# Altium PCB SixPak Ultra.PcbDoc (part 2 of 3)
Units mil, origin at the board's own origin, x right, y up, seen from the top; angles counter-clockwise.
Board outline 13094.87 x 4169.06 mil, 4 copper layers (Top Copper, GND, Signal Layer 2, Bottom Copper), stack 46.063 mil thick; 195 components, 300 nets, 1442 pads, 116 vias.
Unrouted connection lines stored in the file: 618.
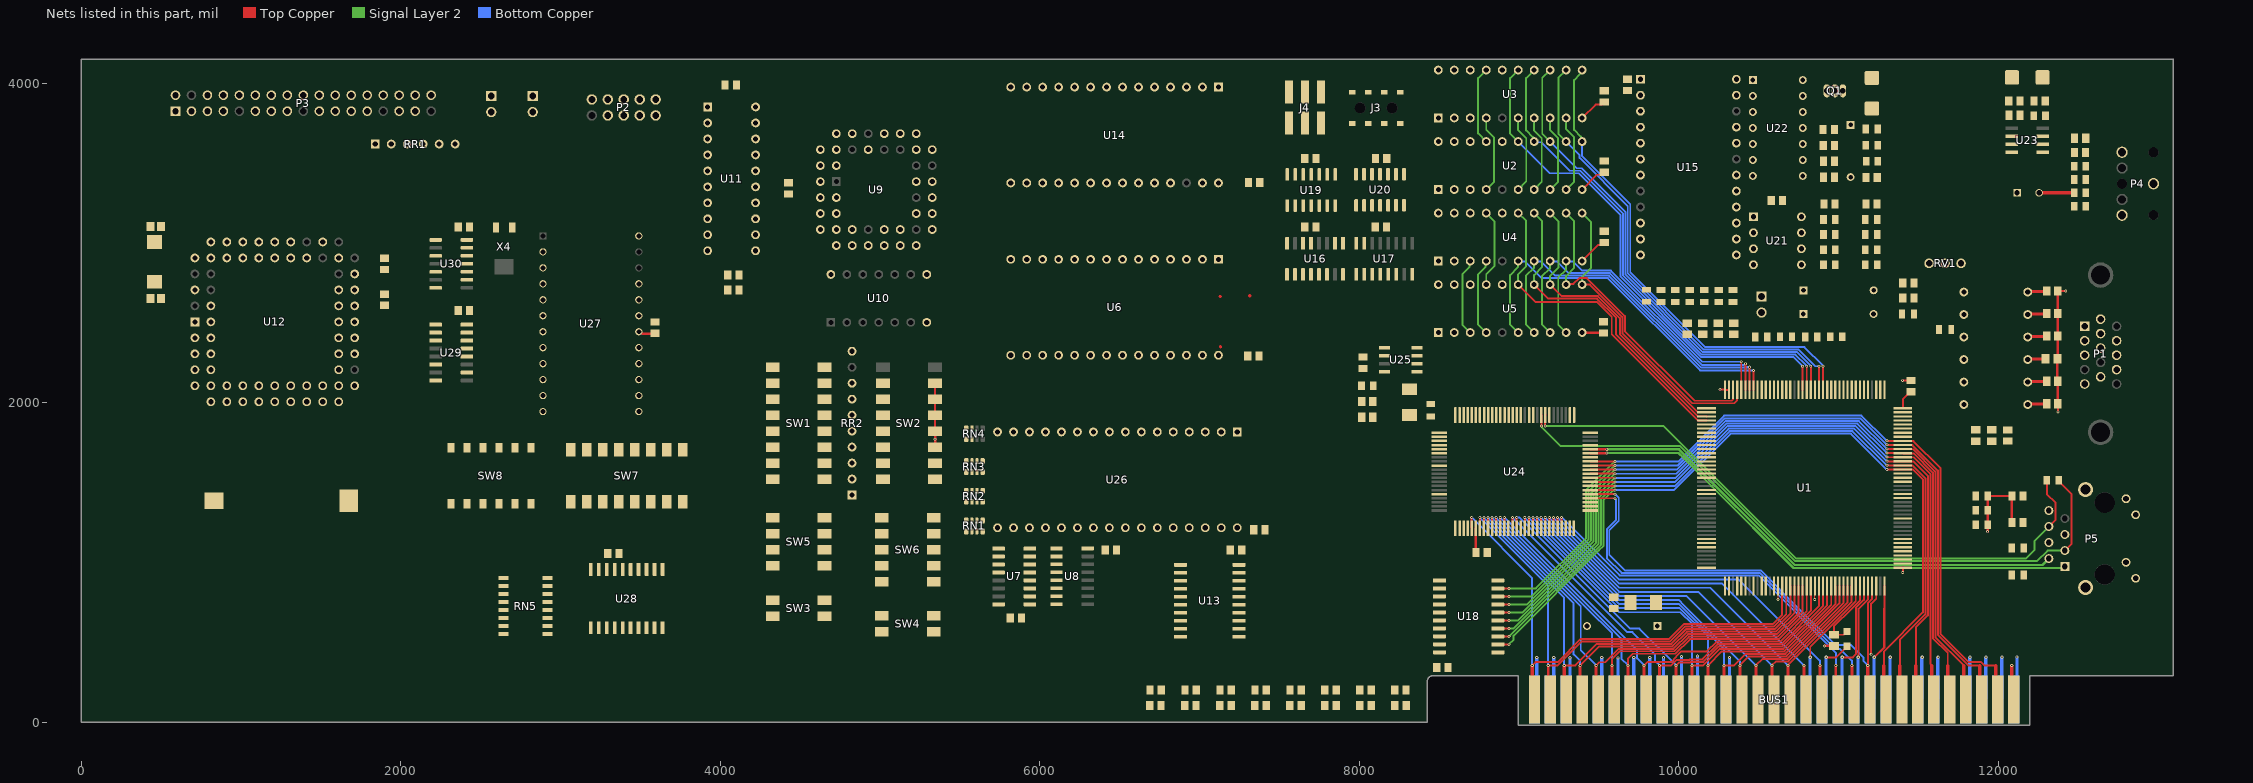
[diagram p4: the nets of this part, all layers, seen from the top]

## Part data
BT1: "Battery Holder (Open) Coin, 20.0mm 1 Cell SMD (SMT) Tab", Package=None, Availability=Unavailable, MF="{'manufacturer': u'Harwin Inc.'}", MP=S8421-45R, Price=None
C1 C2 C3 C4 C5 C6 C7 C8 C12 C14 C40 C48 C50 CD1 CD2 CD3 CD4 CD5 CD6 CD7 CD8 CD9 CD10 CD11 CD12 CD13 CD14 CD15 CD16 CD17 CD18 CD19 CD20 CD21 CD22 CD23 CD24 CD25 CD27 CD28 CD29 CD32: library part TAJR104K035RNJ, "0.1ÂµF Molded Tantalum Capacitors 35V 0805 _2012 Metric_ 29Ohm", Package="0805 AVX", Availability=Unavailable, MF=AVX, MP=TAJR104K035RNJ, Price=None, SnapEDA_Link=https://www.snapeda.com/parts/TAJR104K035RNJ/AVX%20/%20Kyocera/view-part/1689905/?ref=snap
C9 C10 C11 C13 C31 C49 C51 C52 C53 CD42 CD43: library part TACR106K016XTA, "Cap Tant Solid 10uF 16V R CASE 10% (2 X 1.35 X 1.35mm) SMD 2012-15 5 Ohm 125ÂÂŽ T/R", Package=None, Availability=Unavailable, MP=TACR106K016XTA, Price=None
C15 C16: library part CGA4J2X8R1H104K125AA, "0.1 ÂµF Â±10% 50V Ceramic Capacitor X8R 0805 (2012 Metric)", Package="2012 TDK", Check_prices=https://www.snapeda.com/parts/CGA4J2X8R1H104K125AA/TDK/view-part/?ref=eda, Digi-Key_Part_Number=445-5909-2-ND, MF=TDK, MP=CGA4J2X8R1H104K125AA, Purchase-URL=https://pricing.snapeda.com/search/part/CGA4J2X8R1H104K125AA/?ref=eda, SnapEDA_Link=https://www.snapeda.com/parts/CGA4J2X8R1H104K125AA/TDK/view-part/?ref=snap
C17: library part C0805C101J5RAC7800, Package=None, Availability=Unavailable, MP=C0805C101J5RAC7800, Price=None
C18 C19 C20 C21 C22 C23 C24 C26 C27: library part 08055A470JAT2A, "Capacitor: ceramic; 47pF; 50V; C0G; Â±5%; SMD; Case (inch):0805", Package=None, Availability=Unavailable, MP=08055A470JAT2A, Price=None
C25: library part CC0805KFX7R8BB105, "1ÂµF Â±10% 25V Ceramic Capacitor X7R 0805 (2012 Metric)", Package="0805 Yageo", Arrow_Electronics-Purchase-URL=https://snapeda.com/shop?store=Arrow+Electronics&id=1817011, Availability=Good, BuyPart=https://www.snapeda.com/parts/CC0805KFX7R8BB105/Yageo/view-part/1817011/?ref=eda, MF=Yageo, Mouser-Purchase-URL=https://snapeda.com/shop?store=Mouser&id=1817011, MP=CC0805KFX7R8BB105, Price=None, SnapEDA_Link=https://www.snapeda.com/parts/CC0805KFX7R8BB105/Yageo/view-part/1817011/?ref=snap
C28 C29: library part CMP-2007-01412-1, Manufacturer=Vitramon, Part Number=VJ0805A220KXJPW1BC
C30 C32 C33 C34 C35: library part C0805C472J2GAC7800, Package=None, Availability=Unavailable, MP=C0805C472J2GAC7800, Price=None
C36: library part TACR475M020XTA, "4.7uF SMD Solid MnO2 Tantalum Electrolytic Capacitor, 20 V dc +/-20%, TAC Series", Package=None, Availability=Unavailable, MP=TACR475M020XTA, Price=None
C37 C41: library part TAJC106J016RNJ, "10ÂµF Molded Tantalum Capacitors 16V 2312 (6032 Metric) 2Ohm", Package="2312 AVX", Availability=Bad, Check_prices=https://www.snapeda.com/parts/TAJC106J016RNJ/AVX/view-part/1684768/?ref=eda, MF=AVX, MP=TAJC106J016RNJ, Price=None, Purchase-URL=https://pricing.snapeda.com/search/part/TAJC106J016RNJ/?ref=eda, SnapEDA_Link=https://www.snapeda.com/parts/TAJC106J016RNJ/AVX/view-part/1684768/?ref=snap
C38: library part 0805YC102JAT2A, "CAP CER 1000PF 16V 5% X7R 0805", Package=None, Availability=Unavailable, MP=0805YC102JAT2A, Price=None
C39: library part C0805C271F5GACTU, "CAP, MLCC, C0G, 270PF, 50V, 0805", Package=None, Availability=Unavailable, MP=C0805C271F5GACTU, Price=None
C42: library part CGA4C2C0G1H472J060AA, "4700 pF Â±5% 50V Ceramic Capacitor C0G, NP0 0805 (2012 Metric)", Package="2012 TDK", Availability="In Stock", Check_prices=https://www.snapeda.com/parts/CGA4C2C0G1H472J060AA/TDK/view-part/?ref=eda, MF=TDK, MP=CGA4C2C0G1H472J060AA, Price=None, Purchase-URL=https://pricing.snapeda.com/search/part/CGA4C2C0G1H472J060AA/?ref=eda, SnapEDA_Link=https://www.snapeda.com/parts/CGA4C2C0G1H472J060AA/TDK/view-part/?ref=snap
C43: library part ECA1CM471, "470F 16V Aluminum Electrolytic Capacitors Radial, Can 2000 Hrs @ 85C", Package="RADIAL-2 Panasonic", Availability="No availability data", Check_prices=https://www.snapeda.com/parts/ECA1CM471/Panasonic/view-part/5788233/?ref=eda, MF=Panasonic, MP=ECA1CM471, Price=None, SnapEDA_Link=https://www.snapeda.com/parts/ECA1CM471/Panasonic/view-part/5788233/?ref=snap
C44 C45: library part C0805C100K4HACAUTO, Package=None, Availability=Unavailable, MP=C0805C100K4HACAUTO, Price=None
C46 C47: library part C0805C103J4RAC7800, Package=None, Availability=Unavailable, MP=C0805C103J4RAC7800, Price=None
D1: "Small Signal Fast Switching Diodes", Package=None, Availability=Unavailable, MP=1N4148, Price=None
J1 J2 J5: "Header, Friction Lock; MTA-100; 2; 250 VAC; Polyester; Tin; Copper Alloy; Tin", Package=None, Centerline_Pitch="2.54 mm[.1 in]", Digi-Key_Part_Number=A1911-ND, Digi-Key_Purchase_URL=https://www.digikey.com/product-detail/en/te-connectivity-amp-connectors/640452-2/A1911-ND/108973?utm_source=snapeda&utm_medium=aggregator&utm_campaign=symbol, MF="TE Connectivity", MP=640452-2, Number_of_Positions=2, Product_Type=Connector, SnapEDA_Link=https://www.snapeda.com/parts/640452-2/TE%20Connectivity%20AMP%20Connectors/view-part/2877927/?ref=snap, TE_purchase_URL=https://www.te.com/usa-en/product-640452-2.html?te_bu=Cor&te_type=disp&te_campaign=seda_glo_cor-seda-global-disp-prtnr-fy19-seda-model-bom-cta_sma-317_1&elqCampaignId=32493
J3: library part SAMTEC-TSM-104-01-X-DV-AJ, Package=SAMTEC-TSM-104-01-X-DV-A, DeviceName=J, DeviceSetName=SAMTEC-TSM-104-01-X-DV-A, GateName_1=A, LibraryName=SAMTEC-TSM-104-01-X-DV-A, SymbolName_1=SAMTEC-TSM-104-01-X-DV-AA
J4: library part TSM-103-01-T-DV, Package=None, Availability=Unavailable, MF=Samtec, MP=TSM-103-01-T-DV, Price=None
L1 L2 L3: library part 78F5R6J-RC, "No Description Available", Mfr_Name="Bourns Electronics", Copyright="Copyright (C) 2022 Ultra Librarian. All rights reserved.", Digi-Key_Part_Number_1=78F5R6J-RC-ND, Manufacturer_Part_Number=78F5R6J-RC, RefDes=RefDes, Type=DEV
P1: library part DE15
P2: library part 61201021621, "<b> WR-BHD 2.54mm Male Box Header, 10 Pins</b>=>Code : Con_WTB_BHD_2.54_Male_THT_WS_61201021621 <br><a href=\"http://katalog.we-online.de/media/thumbs2/eican/thb_Con_WTB_BHD_2.54_Male_THT_WS_6120xx21621_pf2.jpg\" title=\"Enlarge picture\"> <img src=\"http://katalog.we-online.de/media/thumbs2/eican/thb_Con_WTB_BHD_2.54_Male_THT_WS_6120xx21621_pf2.jpg\"  width=\"320\"></a><p> Details see: <a href=\"http://katalog.we-online.de/en/em/612_0xx_216_21\">http://katalog.we-online.de/en/em/612_0xx_216_21</a><p> Created 2014-06-04, Karrer Zheng<br> 2014 (C) WÃ¼rth Elektronik", Package=None, Availability=Unavailable, MF="{'manufacturer': u'Wurth Elektronik'}", MP=61201021621, Price=None
P3: library part CONN_17X2
P4: library part CONN_5
P5: "1 Port RJ45 Magjack Connector Through Hole 10/100 Base-T, AutoMDIX", Package=None, Digi-Key_Part_Number=RJMG1BD3B8K1ANR-ND, Digi-Key_Purchase_URL=https://www.digikey.com/product-detail/en/amphenol-icc-commercial-products/RJMG1BD3B8K1ANR/RJMG1BD3B8K1ANR-ND/5359794?utm_source=snapeda&utm_medium=aggregator&utm_campaign=symbol, MF="Amphenol ICC", MP=RJMG1BD3B8K1ANR, SnapEDA_Link=https://www.snapeda.com/parts/RJMG1BD3B8K1ANR/Amphenol%20FCI/view-part/1683132/?ref=snap
Q1 SW8 U7 U8 U13 U16 U17 U27 U28 U29 U30 X1: Package=None, Availability=Unavailable, Price=None
  Q1: MP=2N3904
  SW8: MF="{'manufacturer': u'CUI Devices'}", MP=DS04-254-2-06BK-SMT-TR
  U7 U8 U16 U17: MP=SN74ALS138ADR
  U13: MP=SN74LS688DW
  U27: MF="{'manufacturer': u'Maxim Integrated'}", MP=DS12885
  U28: MF="{'manufacturer': u'Texas Instruments'}", MP=SN74LS688DW
  U29: MF="{'manufacturer': u'Texas Instruments'}", MP=SN74HCT139D
  U30: MF="{'manufacturer': u'Texas Instruments'}", MP=CD74HC04M
  X1: MP=ABM3-40.000MHZ-B2-T
R1: library part ERJ6ENF1000V, Package=None, Availability=Unavailable, MP=ERJ6ENF1000V, Price=None
R2: library part AC0805FR-101KL, "1 kOhms Â±1% 0.125W, 1/8W Chip Resistor 0805 (2012 Metric) Automotive AEC-Q200 Thick Film", Package=None, Check_prices=https://www.snapeda.com/parts/AC0805FR-101KL/Yageo/view-part/?ref=eda, Digi-Key_Part_Number=13-AC0805FR-101KLTR-ND, MF=YAGEO, MP=AC0805FR-101KL, Purchase-URL=https://pricing.snapeda.com/search/part/AC0805FR-101KL/?ref=eda, SnapEDA_Link=https://www.snapeda.com/parts/AC0805FR-101KL/Yageo/view-part/?ref=snap
R3 R7 R8 R9: library part ERJ-6GEYJ151V, "Res Thick Film 0805 150 Ohm 5% 0.125W(1/8W) Â}200ppm/ÂÂŽ Molded SMD Automotive T/R", Package=None, Availability=Unavailable, MP=ERJ-6GEYJ151V, Price=None
R4 R5: library part RMCF0805JT33R0, Package=None, Availability=Unavailable, MP=RMCF0805JT33R0, Price=None
R6 R10 R11 R12 R13 R14 R15 R16: library part RC0805FR-074K7L, "4.7 kOhms Â±1% 0.125W, 1/8W Chip Resistor 0805 _2012 Metric_ Moisture Resistant Thick Film", Package="2012 Rohm Semiconductor", Digi-Key_Part_Number=311-4.70KCRCT-ND, Digi-Key_Purchase_URL=https://www.digikey.com.eg/product-detail/en/yageo/RC0805FR-074K7L/311-4.70KCRCT-ND/730876?utm_source=snapeda&utm_medium=aggregator&utm_campaign=symbol, MF=Yageo, MP=RC0805FR-074K7L, SnapEDA_Link=https://www.snapeda.com/parts/RC0805FR-074K7L/Yageo/view-part/523399/?ref=snap
R17: library part AC0805JR-072K2L, "AC0805 2,2K 5% 0,125W AUTOMO", Package=None, Availability=Unavailable, MP=AC0805JR-072K2L, Price=None
R18 R19 R22 R23 R26 R27: library part ERJ-PB6B2201V, Package=None, Availability=Unavailable, MP=ERJ-PB6B2201V, Price=None
R20: library part ERJ-PB6B1202V, Package=None, Availability=Unavailable, MP=ERJ-PB6B1202V, Price=None
R21 R25 R28 R31: library part ERJ-PB6B1002V, "10 kOhms Â±0.1% 0.25W, 1/4W Chip Resistor 0805 (2012 Metric) Automotive AEC-Q200, Pulse Withstanding Thick Film", Package="2012 Panasonic Electronic Components", Check_prices=https://www.snapeda.com/parts/ERJ-PB6B1002V/Panasonic%20Electronic%20Components/view-part/3737287/?ref=eda, Digi-Key_Part_Number=P20708CT-ND, MF="Panasonic Electronic", MP=ERJ-PB6B1002V, SnapEDA_Link=https://www.snapeda.com/parts/ERJ-PB6B1002V/Panasonic%20Electronic%20Components/view-part/3737287/?ref=snap
R24: library part ERJ-PB6B1501V, "Res Thick Film 0805 1.5K Ohm 0.1% 0.25W(1/4W) Â±50ppm/C Pad SMD Automotive T/R", Package=None, Availability=Unavailable, MP=ERJ-PB6B1501V, Price=None
R29 R30 R32 R33 R34: library part ERJ-PB6B8201V, Package=None, Availability=Unavailable, MP=ERJ-PB6B8201V, Price=None
R35 R36: library part ERJ-PB6B4700V, Package=None, Availability=Unavailable, MP=ERJ-PB6B4700V, Price=None
R37: library part RK73H2ARTTD2702F, "Res Thick Film 0805 27K Ohm 1% 0.25W(1/4W) Â±100ppm/Â°C Sulfur Resistant Pad SMD Automotive T/R", Package=None, Availability=Unavailable, MF="{'manufacturer': u'KOA Speer'}", MP=RK73H2ARTTD2702F, Price=None
R38: library part ERJ-PB6B2000V, "Res Thick Film 0805 200 Ohm 0.1% 0.25W(1/4W) Â±50ppm/C Pad SMD Automotive T/R", Package=None, Availability=Unavailable, MF="{'manufacturer': u'Panasonic'}", MP=ERJ-PB6B2000V, Price=None
RN1 RN2 RN3 RN4: library part EXB-38V103JV, "Res Thick Film Array 470 Ohm 5% ?200ppm/C ISOL Molded 8-Pin 1206(4 X 0603) Convex SMD Automotive T/R", Package=None, Availability=Unavailable, MF="{'manufacturer': u'Panasonic'}", MP=EXB-38V103JV, Price=None
RN5: library part 4816P-1-103LF, "Res Thick Film NET 68K Ohm 2% 1.28W Â±100ppm/C ISOL Molded 16-Pin SOM Gull Wing SMD Automotive T/R", Package=None, Availability=Unavailable, MF="{'manufacturer': u'Bourns'}", MP=4816P-1-103LF, Price=None
RR1: library part RR5
RR2: library part RR9
RV1: library part POT
SW1 SW2: "AD Series 8 Position SPST Extended Slide Non Sealed 2.54 mm Pitch SMT DIP Switch", Package="DIP-4 TE Connectivity", Availability=Unavailable, EU_RoHS_Compliance=Compliant, MF="TE Connectivity", MP=1-1825058-9, Price=None, SnapEDA_Link=https://www.snapeda.com/parts/1-1825058-9/TE%20Connectivity%20ALCOSWITCH%20Switches/view-part/52148/?ref=snap, TE_purchase_URL=https://www.te.com/usa-en/product-1-1825058-9.html?te_bu=Cor&te_type=disp&te_campaign=seda_glo_cor-seda-global-disp-prtnr-fy19-seda-model-bom-cta_sma-317_1&elqCampaignId=32493
SW3 SW4 SW5 SW6 SW7: "SPST Flush Slide Sealed 2.54 mm Pitch Surface Mount DIP Switch", Package=None, Availability=Unavailable, MF="{'manufacturer': u'TE Connectivity'}", Price=None
  SW3 SW4: MP=1825059-1
  SW5: MP=1-1825059-7
  SW6: MP=2-1825059-3
  SW7: MP=4-1825059-1
U10: library part OSC
U18: "Octal bus transceivers 20-SOIC 0 to 70", Package="SOIC-20 Texas Instruments", Check_prices=https://www.snapeda.com/parts/SN74LS245DW/Texas%20Instruments/view-part/564932/?ref=eda, Digi-Key_Part_Number=296-1214-2-ND, MF="Texas Instruments", MP=SN74LS245DW, Purchase-URL=https://pricing.snapeda.com/search/part/SN74LS245DW/?ref=eda, SnapEDA_Link=https://www.snapeda.com/parts/SN74LS245DW/Texas%20Instruments/view-part/564932/?ref=snap
U19: "6-ch, 4.75-V to 5.25-V bipolar inverters", Package="SOIC-14 Texas Instruments", Availability="In Stock", Check_prices=https://www.snapeda.com/parts/SN74LS04DR/Texas+Instruments/view-part/?ref=eda, MF="Texas Instruments", MP=SN74LS04DR, Price=None, Purchase-URL=https://pricing.snapeda.com/search/part/SN74LS04DR/?ref=eda, SnapEDA_Link=https://www.snapeda.com/parts/SN74LS04DR/Texas+Instruments/view-part/?ref=snap
U20: "Dual D-type pos.-edge-triggered flip-flops with preset and clear 14-SOIC 0 to 70", Package="SOIC-14 Texas Instruments", Availability=Good, Check_prices=https://www.snapeda.com/parts/SN74LS74AD/Texas%20Instruments/view-part/580890/?ref=eda, MF="Texas Instruments", MP=SN74LS74AD, Price=None, Purchase-URL=https://pricing.snapeda.com/search/part/SN74LS74AD/?ref=eda, SnapEDA_Link=https://www.snapeda.com/parts/SN74LS74AD/Texas%20Instruments/view-part/580890/?ref=snap
U22: "Quad general purpose 30V operational amplifier 14-PDIP 0 to 70", Package="PDIP-14 Texas Instruments", Availability=Good, Check_prices=https://www.snapeda.com/parts/RC4136N/Texas%20Instruments/view-part/568586/?ref=eda, MF="Texas Instruments", MP=RC4136N, Price=None, Purchase-URL=https://pricing.snapeda.com/search/part/RC4136N/?ref=eda, SnapEDA_Link=https://www.snapeda.com/parts/RC4136N/Texas%20Instruments/view-part/568586/?ref=snap
U23: "Wide Input Voltage Low Power Audio Amplifier with Internal Gain", Package="SOIC-8 Texas Instruments", Availability=Unavailable, MF="Texas Instruments", MP=LM386MX-1/NOPB, Price=None, SnapEDA_Link=https://www.snapeda.com/parts/LM386MX-1/NOPB/Texas%20Instruments/view-part/216475/?ref=snap, Texas_Instruments-Purchase-URL=https://snapeda.com/shop?store=Texas+Instruments&id=216475
U25: library part 93LCxxC
X2: library part ECS-240-12-20A-TR, "SMD CRYSTAL", Package=None, Availability=Unavailable, MF="{'manufacturer': u'ECS Inc.'}", MP=ECS-240-12-20A-TR, Price=None
X3: library part ABM3-20.000MHZ-B2-T, "20 MHz Â±20ppm Crystal 18pF 30 Ohms 2-SMD, No Lead", Package="SMD-2 Abracon", Availability="In Stock", Check_prices=https://www.snapeda.com/parts/ABM3-20.000MHZ-B2-T/Abracon+LLC/view-part/?ref=eda, MF=Abracon, MP=ABM3-20.000MHZ-B2-T, Price=None, Purchase-URL=https://pricing.snapeda.com/search/part/ABM3-20.000MHZ-B2-T/?ref=eda, SnapEDA_Link=https://www.snapeda.com/parts/ABM3-20.000MHZ-B2-T/Abracon+LLC/view-part/?ref=snap
X4: library part MS1V-T1K-32.768KHZ-7PF-20PPM-TA-QC-AU, "Tuning Fork Crystal 30 kHz â€“ 200 kHz", Package=None, Availability=Unavailable, MF="{'manufacturer': u'Micro Crystal'}", MP=MS1V-T1K-32.768KHZ-7PF-20PPM-TA-QC-AU, Price=None

## Via types
v1: diameter 18, hole 7.9, Top Copper to Bottom Copper, 70 vias
v2: diameter 20, hole 7.9, Top Copper to Bottom Copper, 46 vias

## Nets (pads, with @x,y where several pads share a name; then routed paths per layer and width w, separated by ;. In a path a pad name is that pad's centre, name@x,y a point inside that pad or via, vN(x,y) a via of type N, cw(c..) or ccw(c..) an arc to the next point about the centre after c; other vN are vias at no path point)
+12: BUS1.9 C48.1 C49.1 C52.1 CD42.1 CD43.1 U11.1 U23.6 | length 277.9
  Bottom Copper w20: BUS1.9@11305,135 11320,150 11320,403.7 v2(11322.1,405.8)
A0: BUS1.62 U1.135 U9.31 U12.7 U14.10 U15.4 U24.5 U26.12 U29.3 U29.13 | length 3255.7
  Top Copper w12: U24.5@8702.58,1213.33 v1(8702.58,1280.8) ; v2(9081.52,355) 9102.52,376 9240.45,376 9385.45,521 9939.3,521 10031.3,613 10587.64,613 10646,671.36 U1.135@10646,851.6
  Top Copper w20: v2(9081.52,355) 9081.52,158.48 BUS1.62@9105,135
  Bottom Copper w12: v1(8702.58,1280.8) 9081.52,901.85 v2(9081.52,355)
A1: BUS1.61 U1.136 U6.10 U9.30 U12.8 U14.9 U17.1 U24.7 U26.11 | length 3200.9
  Top Copper w12: U24.7@8753.76,1213.33 v1(8753.76,1280.8) ; v2(9181.56,355) 9241.37,355 9391.87,505.5 9945.72,505.5 10037.72,597.5 10594.06,597.5 10671.6,675.04 U1.136@10671.6,851.6
  Top Copper w15: v2(9181.56,355) 9181.56,158.44 BUS1.61@9205,135
  Bottom Copper w12: v1(8753.76,1280.8) 8753.76,1278.11 8771.06,1260.8 8773.76,1260.8 9181.56,853 v2(9181.56,355)
A2: BUS1.60 U1.137 U6.9 U9.29 U12.10 U14.8 U17.2 U24.8 U26.10 U28.2 | length 3155.2
  Top Copper w12: U24.8@8779.35,1213.33 v1(8779.35,1280.8) ; v2(9281.59,355) 9351.92,355 9486.92,490 9952.14,490 10044.14,582 10600.48,582 10697.2,678.72 U1.137@10697.2,851.6
  Top Copper w20: v2(9281.59,355) 9281.59,158.41 BUS1.60@9305,135
  Bottom Copper w12: v1(8779.35,1280.8) 8779.35,1278.11 8796.65,1260.8 8799.35,1260.8 9281.59,778.56 v2(9281.59,355)
A3: BUS1.59 U1.138 U6.8 U7.3 U14.7 U17.6 U24.9 U26.9 U28.4 | length 3109.4
  Top Copper w12: U24.9@8804.94,1213.33 v1(8804.94,1280.8) ; v2(9381.62,355) 9501.12,474.5 9958.56,474.5 10050.56,566.5 10606.9,566.5 10722.8,682.4 U1.138@10722.8,851.6
  Top Copper w20: v2(9381.62,355) 9381.62,158.38 BUS1.59@9405,135
  Bottom Copper w12: v1(8804.94,1280.8) 8804.94,1278.11 8822.24,1260.8 8824.94,1260.8 9341.2,744.54 9341.2,424.4 9381.62,383.98 v2(9381.62,355)
A4: BUS1.58 U1.139 U6.7 U7.2 U14.6 U16.1 U24.10 U26.8 U28.6 | length 3063.6
  Top Copper w12: U24.10@8830.53,1213.33 v1(8830.53,1280.8) ; v2(9481.66,355) 9501.24,374.58 9539.13,374.58 9623.55,459 9964.98,459 10056.98,551 10613.32,551 10748.4,686.08 U1.139@10748.4,851.6
  Top Copper w20: v2(9481.66,355) 9481.66,158.34 BUS1.58@9505,135
  Bottom Copper w12: v1(8830.53,1280.8) 8830.53,1279.18 8833.53,1276.18 8833.53,1275.11 8847.83,1260.8 8850.53,1260.8 9385.66,725.67 9385.66,451 v2(9481.66,355)
A5: BUS1.57 U1.140 U6.6 U7.6 U14.5 U17.3 U24.11 U26.7 U28.8 | length 3041.4
  Top Copper w12: U24.11@8856.12,1213.33 v1(8856.12,1280.8) ; v2(9581.69,355) 9581.69,395.22 9629.97,443.5 9971.4,443.5 10063.4,535.5 10619.74,535.5 10774,689.76 U1.140@10774,851.6
  Top Copper w20: v2(9581.69,355) 9581.69,158.31 BUS1.57@9605,135
  Bottom Copper w12: v1(8856.12,1280.8) 8856.12,1278.11 8873.43,1260.8 8876.12,1260.8 9427.55,709.37 9581.69,555.23 v2(9581.69,355)
A6: BUS1.56 U1.141 U6.5 U8.1 U14.4 U17.5 U24.12 U26.6 U28.11 | length 2997.6
  Top Copper w12: U24.12@8881.71,1213.33 v1(8881.71,1280.8) ; v2(9681.72,355) 9681.72,398.52 9711.2,428 9977.82,428 10069.82,520 10626.16,520 10799.6,693.44 U1.141@10799.6,851.6
  Top Copper w20: v2(9681.72,355) 9681.72,158.28 9696.8,143.2 BUS1.56@9705,135
  Bottom Copper w12: v1(8881.71,1280.8) 8881.71,1278.11 8899.02,1260.8 8901.71,1260.8 9639.42,523.09 9639.42,397.31 v2(9681.72,355)
A7: BUS1.55 U1.142 U6.4 U8.2 U14.3 U16.2 U24.13 U26.5 U28.13 | length 2926.7
  Top Copper w12: U24.13@8907.3,1213.33 v1(8907.3,1280.8) ; v2(9781.76,355) 9802.76,376 9951.08,376 9983.07,407.99 9983.07,411.33 10014.7,442.96 10174.39,442.96 10235.93,504.5 10632.58,504.5 10825.2,697.12 U1.142@10825.2,851.6
  Top Copper w20: v2(9781.76,355) 9781.76,158.24 BUS1.55@9805,135
  Bottom Copper w12: v1(8907.3,1280.8) 9737.8,450.3 9737.8,398.95 v2(9781.76,355)
A8: BUS1.54 U1.144 U6.3 U7.1 U14.25 U16.3 U24.15 U26.27 U28.15 | length 2900
  Top Copper w12: U24.15@8958.48,1213.33 v1(8958.48,1280.8) ; v2@9881.79,355 9952,355 9986.9,389.9 10065.07,389.9 10068.17,393 10146.35,393 10242.35,489 10639,489 10876.4,726.4 U1.144@10876.4,851.6
  Top Copper w20: v2(9878.4,355) 9878.4,161.6 BUS1.54@9905,135
  Bottom Copper w12: v1(8958.48,1280.8) 8958.48,1278.11 8975.79,1260.8 8978.48,1260.8 9675.38,563.9 9708.6,563.9 9851.2,421.3 9851.2,382.2 v2(9878.4,355)
A9: BUS1.53 U1.145 U6.25 U8.3 U14.24 U16.6 U24.16 U26.26 U28.17 | length 2876.4
  Top Copper w12: U24.16@8984.07,1213.33 v1(8984.07,1280.8) ; v2(9981.82,355) 10001.22,374.4 10071.56,374.4 10074.52,377.36 10152.64,377.36 10248.77,473.5 10647.11,473.5 10902,728.39 U1.145@10902,851.6
  Top Copper w20: v2(9981.82,355) 9981.82,158.18 9996.8,143.2 BUS1.53@10005,135
  Bottom Copper w12: v1(8984.07,1280.8) 9000.3,1280.8 9696.3,584.8 9752.02,584.8 v2(9981.82,355)
A10: BUS1.52 U1.146 U6.24 U14.21 U24.18 U26.23 | length 3002.3
  Top Copper w12: U24.18@9035.25,1213.33 v1(9035.25,1281) ; v2(10081.86,355) 10152.19,355 10255.19,458 10653.53,458 10927.5,731.97 U1.146@10927.5,851.6
  Top Copper w20: v2(10081.86,355) 10081.86,158.14 BUS1.52@10105,135
  Bottom Copper w12: v1(9035.25,1281) 9035.25,1278.31 9625.83,687.73 10008.47,687.73 10081.86,614.34 v2(10081.86,355)
A11: BUS1.51 U1.147 U6.21 U14.23 U24.19 U26.25 | length 2954.4
  Top Copper w12: U24.19@9060.84,1213.33 v1(9060.84,1281) ; v2(10181.89,355) 10269.39,442.5 10659.95,442.5 10953.1,735.65 U1.147@10953.1,851.6
  Top Copper w20: v2(10181.89,355) 10181.89,158.11 BUS1.51@10205,135
  Bottom Copper w12: v1(9060.84,1281) 9060.84,1278.31 9625.82,713.33 10004.79,713.33 10181.89,536.23 v2(10181.89,355)
A12: BUS1.50 U1.148 U6.23 U14.2 U24.20 U26.4 | length 2906.5
  Top Copper w12: U24.20@9086.43,1213.33 v1(9086.43,1281) ; v2(10281.92,355) 10345,355 10417,427 10666.38,427 10978.7,739.33 U1.148@10978.7,851.6
  Top Copper w20: v2(10281.92,355) 10281.92,158.08 10296.8,143.2 BUS1.50@10305,135
  Bottom Copper w12: v1(9086.43,1281) 9086.43,1278.31 9625.82,738.92 10001.12,738.92 10029.56,710.48 10030.49,709.55 10281.92,458.12 v2(10281.92,355)
A13: BUS1.49 U1.149 U6.2 U13.15 U24.21 U26.28 | length 2858.6
  Top Copper w12: U24.21@9112.02,1213.33 v1(9112.02,1281) ; v2(10381.96,355) 10438.39,411.43 10672.73,411.43 11004.3,743.01 U1.149@11004.3,851.6
  Top Copper w20: v2(10381.96,355) 10381.96,158.04 BUS1.49@10405,135
  Bottom Copper w12: v1(9112.02,1281) 9112.02,1278.31 9625.82,764.51 9997.45,764.51 10029.56,732.4 10052.41,709.55 10381.96,380.01 v2(10381.96,355)
A14: BUS1.48 U1.150 U6.26 U13.13 U24.22 | length 2841.8
  Top Copper w12: U24.22@9137.61,1213.33 v1(9137.61,1281) ; v2(10481.99,355) 10522.92,395.93 10679.15,395.93 11029.9,746.68 U1.150@11029.9,851.6
  Top Copper w20: v2(10481.99,355) 10481.99,158.01 BUS1.48@10505,135
  Bottom Copper w12: v1(9137.61,1281) 9137.61,1278.31 9625.83,790.1 10046.89,790.1 v2(10481.99,355)
A15: BUS1.47 U1.151 U13.11 U24.23 | length 2839.6
  Top Copper w12: U24.23@9163.21,1213.33 v1(9163.21,1281) ; v2(10582.02,355) 10607.46,380.43 10685.57,380.43 11055.5,750.36 U1.151@11055.5,851.6
  Top Copper w20: v2(10582.02,355) 10582.02,157.98 BUS1.47@10605,135
  Bottom Copper w12: v1(9163.21,1281) 9163.21,1278.31 9625.82,815.69 10121.33,815.69 v2(10582.02,355)
A16: BUS1.46 U1.152 U13.8 U24.24 | length 2837.5
  Top Copper w12: U24.24@9188.8,1213.33 v1(9188.8,1281) ; v2(10682.06,355) 11081.1,754.04 U1.152@11081.1,851.6
  Top Copper w20: v2(10682.06,355) 10682.06,157.94 BUS1.46@10705,135
  Bottom Copper w12: v1(9188.8,1281) 9188.8,1278.31 9625.82,841.28 10195.78,841.28 v2(10682.06,355)
A17: BUS1.45 U1.113 U13.6 U24.25 | length 2250
  Top Copper w12: U24.25@9214.39,1213.33 v1(9214.39,1281)
  Top Copper w20: v2(10782.09,355) 10782.09,157.91 BUS1.45@10805,135
  Bottom Copper w12: v1(9214.39,1281) 9214.39,1278.31 9625.82,866.87 10270.22,866.87 v2(10782.09,355)
A18: BUS1.44 U1.114 U13.4 U24.26 | length 2341.7
  Top Copper w12: U24.26@9239.98,1213.33 v1(9239.98,1281)
  Top Copper w20: v2(10882.12,355) 10882.12,157.88 BUS1.44@10905,135
  Bottom Copper w12: v1(9239.98,1281) 9239.98,1278.31 9625.83,892.46 10029.56,892.46 10374.14,892.46 10557.05,709.55 10882.12,384.48 v2(10882.12,355)
A19: BUS1.43 U1.115 U13.2 U24.27 | length 2443.6
  Top Copper w12: U24.27@9265.57,1213.33 v1(9265.57,1281)
  Top Copper w15: v2(10982.16,355) 10982.16,157.84 BUS1.43@11005,135
  Bottom Copper w12: v1(9265.57,1281) 9628.52,918.05 10498.23,918.05 10982.16,434.13 v2(10982.16,355)
AEN: BUS1.42 U7.4 U16.4 U24.34 U28.1 | length 2615
  Top Copper w12: U24.34@9444.7,1401.32 9504.9,1401.32 9598.76,1401.32 v1(9599.3,1400.79)
  Top Copper w20: v2(11082.19,355) 11082.19,157.81 BUS1.42@11105,135
  Bottom Copper w12: v1(9599.3,1400.79) 9599.3,1399.16 9606.7,1391.76 9606.7,1266.6 9548.5,1208.4 9548.5,1026.7 9641.65,933.55 10504.65,933.55 10980.58,457.63 11009.47,457.63 11082.19,384.91 v2(11082.19,355)
AMP_OUT: C42.1 C43.P U23.5
AUI: RN4.1 U24.64
AVDD1: C11.1 C12.1 C16.2 L1.1 U1.124
AVDD2: C13.1 C14.1 L2.1 U1.6 U1.13
B: FB3.1 R9.2 U1.2
BA14: U24.74 U26.29
BA15: U24.73 U26.3
BA16: RN4.2 U24.72 U26.2
BA17: RN3.4 U24.71 U26.30
BA18: RN3.3 U24.69 U26.1
BA19: RN3.2 U24.68
BA20: RN3.1 U24.67
BA21: RN1.2 U24.66
BD0: RN2.4 U24.85 U26.13
BD1: RN2.3 U24.84 U26.14
BD2: RN2.2 U24.82 U26.15
BD3: RN2.1 U24.81 U26.17
BD4: U24.80 U26.18
BD5: RN1.4 U24.79 U25.2 U26.19
BD6: RN1.3 U24.78 U25.3 U26.20
BD7: U24.77 U25.4 U26.21
CTS: P2.6 U11.7
D0: BUS1.40 U1.25 U9.2 U12.11 U14.11 U18.2 U24.36 U27.4 | length 5158.8
  Top Copper w12: U18.2@8866.35,486.65 v1(8936.3,486.65) ; U24.36@9444.7,1452.5 9598.96,1452.5 v1(9599.5,1451.97) ; 11282.26,355 11282.26,441.51 11527,686.26 11527,1519 11465.9,1580.1 11401.9,1580.1 U1.25@11401,1581 v1(11301,1581)
  Top Copper w20: 11282.26,355 11282.26,157.74 BUS1.40@11305,135
  Signal Layer 2 w12: v1(8936.3,486.65) 8965.3,515.65 8965.3,541.1 9498.8,1074.6 9498.8,1075.78 9527.9,1104.88 9527.9,1390.4 9588.32,1450.82 9598.35,1450.82 v1(9599.5,1451.97)
  Bottom Copper w12: v1(9599.5,1451.97) 9968.91,1451.97 10323.04,1806.1 11075.9,1806.1 v1(11301,1581)
D1: BUS1.39 U1.26 U9.3 U12.13 U14.12 U18.3 U24.37 U27.5 | length 5118.3
  Top Copper w12: U18.3@8866.35,536.65 v1(8936.3,536.65) ; U24.37@9444.7,1478.09 9598.96,1478.09 v1(9599.5,1477.56) ; v1(11302.34,1607.94) 11303.97,1607.94 11305.31,1606.6 U1.26@11401,1606.6 ; 11382.29,355 11382.29,514.29 11542.5,674.5 11542.5,1525.42 11462.22,1605.7 U1.26@11401.9,1605.7
  Top Copper w20: 11382.29,355 11382.29,157.71 BUS1.39@11405,135
  Signal Layer 2 w12: v1(8936.3,536.65) 8937.75,536.65 9512.4,1111.3 9512.4,1396.82 9587.54,1471.97 9592.28,1471.97 9597.88,1477.56 v1(9599.5,1477.56)
  Bottom Copper w12: v1(9599.5,1477.56) 9972.58,1477.56 10316.62,1821.6 11086,1821.6 11296.66,1610.94 11297.72,1610.94 11300.72,1607.94 v1(11302.34,1607.94)
D2: BUS1.38 U1.27 U9.4 U12.14 U14.13 U18.4 U24.38 U27.6 | length 5102.2
  Top Copper w12: U18.4@8866.35,586.65 v1(8936.3,586.65) ; U24.38@9444.7,1503.68 9567.31,1503.68 9568.66,1502.34 v1(9600.31,1502.34) ; v1(11302.34,1633.54) 11303.97,1633.54 11305.31,1632.2 U1.27@11401,1632.2 11401.9,1631.3 11467.33,1631.3 11558,1540.63 11558,668.08 11482.32,592.4 11482.32,355
  Top Copper w20: 11482.32,355 11482.32,157.68 BUS1.38@11505,135
  Signal Layer 2 w12: v1(8936.3,586.65) 8965.83,586.65 9496.9,1117.72 9496.9,1153.13 9496.9,1403.24 9504.9,1411.24 9591.22,1497.56 9593.91,1497.56 9598.69,1502.34 v1(9600.31,1502.34)
  Bottom Copper w12: v1(9600.31,1502.34) 9601.12,1503.15 9976.25,1503.15 10310.2,1837.1 11096.1,1837.1 11296.66,1636.54 11297.72,1636.54 11300.72,1633.54 v1(11302.34,1633.54)
D3: BUS1.37 U1.28 U9.5 U12.15 U14.15 U18.5 U24.39 U27.7 | length 5090.3
  Top Copper w12: U18.5@8866.35,636.65 v1(8936.3,636.65) ; U24.39@9444.7,1529.27 9598.96,1529.27 v1(9599.5,1528.74) ; v1(11302.34,1659.14) 11303.97,1659.14 11305.31,1657.8 U1.28@11401,1657.8 11470.2,1657.8 11573.5,1554.5 11573.5,366.02 11582.36,357.16 11582.36,355
  Top Copper w20: 11582.36,355 11582.36,157.64 BUS1.37@11605,135
  Signal Layer 2 w12: v1(8936.3,636.65) 8993.91,636.65 9481.4,1124.14 9481.4,1153.13 9481.4,1411.71 9504.9,1435.21 9598.43,1528.74 v1(9599.5,1528.74)
  Bottom Copper w12: v1(9599.5,1528.74) 9979.92,1528.74 10303.78,1852.6 11106.2,1852.6 11296.66,1662.14 11297.72,1662.14 11300.72,1659.14 v1(11302.34,1659.14)
D4: BUS1.36 U1.29 U9.6 U12.17 U14.16 U18.6 U24.40 U27.8 | length 5140.5
  Top Copper w12: U18.6@8866.35,686.65 v1(8936.3,686.65) ; U24.40@9444.7,1554.87 9598.96,1554.87 v1(9599.5,1554.33) ; v1(11302.39,1684.69) 11304.02,1684.69 11305.41,1683.3 U1.29@11401,1683.3 11401.9,1682.4 11468.68,1682.4 11589,1562.08 11589,526.5 11682.39,433.11 11682.39,355
  Top Copper w20: 11682.39,355 11682.39,157.61 11696.8,143.2 BUS1.36@11705,135
  Signal Layer 2 w12: v1(8936.3,686.65) 9021.99,686.65 9465.9,1130.56 9465.9,1153.13 9465.9,1423.42 9504.9,1462.42 9591.22,1548.74 9592.28,1548.74 9597.88,1554.33 v1(9599.5,1554.33)
  Bottom Copper w12: v1(9599.5,1554.33) 9983.59,1554.33 10297.36,1868.1 11116.2,1868.1 11296.61,1687.69 11297.77,1687.69 11300.77,1684.69 v1(11302.39,1684.69)
D5: BUS1.35 U1.30 U9.7 U12.19 U14.17 U18.7 U24.41 U27.9 | length 5189
  Top Copper w12: U18.7@8866.35,736.65 v1(8936.3,736.65) ; U24.41@9444.7,1580.46 9598.96,1580.46 v1(9599.5,1579.92) ; v1(11302.34,1710.24) 11303.97,1710.24 11305.31,1708.9 U1.30@11401,1708.9 11401.9,1708 11465,1708 11605,1568 11605,532.42 11782.42,355 11782.42,354.25
  Top Copper w20: 11782.42,354.25 11782.42,157.58 BUS1.35@11805,135
  Signal Layer 2 w12: v1(8936.3,736.65) 9050.07,736.65 9450.4,1136.98 9450.4,1153.13 9450.4,1433.51 9504.9,1488.01 9591.22,1574.33 9592.29,1574.33 9597.88,1579.92 v1(9599.5,1579.92)
  Bottom Copper w12: v1(9599.5,1579.92) 9987.26,1579.92 10290.94,1883.6 11126.3,1883.6 11296.66,1713.24 11297.72,1713.24 11300.72,1710.24 v1(11302.34,1710.24)
D6: BUS1.34 U1.31 U9.8 U12.20 U14.18 U18.8 U24.42 U27.10 | length 5279.1
  Top Copper w12: U18.8@8866.35,786.65 v1(8936.3,786.65) ; U24.42@9444.7,1606.05 9598.96,1606.05 v1(9599.5,1605.51) ; v1(11302.34,1735.84) 11303.97,1735.84 11305.31,1734.5 U1.31@11401,1734.5 11401.9,1733.6 11461.32,1733.6 11620.5,1574.42 11620.5,545.87 11811.37,355 11882.29,355 11882.47,354.82
  Top Copper w20: 11882.47,354.82 11882.47,157.53 BUS1.34@11905,135
  Signal Layer 2 w12: v1(8936.3,786.65) 9078.15,786.65 9434.9,1143.4 9434.9,1153.13 9434.9,1443.6 9591.22,1599.92 9592.29,1599.92 9597.88,1605.51 v1(9599.5,1605.51)
  Bottom Copper w12: v1(9599.5,1605.51) 9990.93,1605.51 10284.52,1899.1 11136.4,1899.1 11296.66,1738.84 11297.72,1738.84 11300.72,1735.84 v1(11302.34,1735.84)
D7: BUS1.33 U1.32 U9.9 U12.22 U14.19 U18.9 U24.43 U27.11 | length 5381.9
  Top Copper w12: U18.9@8866.35,836.65 v1(8936.3,836.65) ; U24.43@9444.7,1631.64 9598.96,1631.64 v1(9599.5,1631.1) ; v1(11302.34,1761.44) 11303.97,1761.44 11305.31,1760.1 U1.32@11401,1760.1 11401.9,1759.2 11467.8,1759.2 11636,1591 11636,553 11812,377 11889.99,377 11911.99,355 11982.49,355
  Top Copper w20: 11982.49,355 11982.49,157.51 11996.8,143.2 BUS1.33@12005,135
  Signal Layer 2 w12: v1(8936.3,836.65) 9105.25,836.65 9419.4,1150.8 9419.4,1153.13 9419.4,1453.69 9591.22,1625.51 9592.29,1625.51 9597.88,1631.1 v1(9599.5,1631.1)
  Bottom Copper w12: v1(9599.5,1631.1) 9994.6,1631.1 10282.3,1918.8 11142.3,1918.8 11296.66,1764.44 11297.72,1764.44 11300.72,1761.44 v1(11302.34,1761.44)
DAC_CLK: U15.23 U21.5
DAC_DATA: U15.21 U21.4
DAC_SYNC: U15.20 U21.3
DB0: U15.10 U18.18
DB1: U15.11 U18.17
DB2: U15.13 U18.16
DB3: U15.14 U18.15
DB4: U15.15 U18.14
DB5: U15.16 U18.13
DB6: U15.17 U18.12
DB7: U15.18 U18.11
DCD: P2.1 U11.2
DENSL: P3.2 U12.49
DIR: P3.18 U12.56
DRQ2: BUS1.6 U12.24 | length 277.9
  Bottom Copper w20: BUS1.6@11605,135 11620,150 11620,403.6 v2(11622.2,405.8)
DSA: P3.14 U12.58
DSB: P3.12 U12.62
DSKCG: P3.34 RR1.6 U12.31
DSR: P2.2 U11.3
DTR: P2.7 U11.8
EECS: U24.76 U25.1
EXPROMRDY: RR2.10 U14.1
FILTER_OUT: C35.2 C36.1 R24.2 U22.12
G: FB2.1 R8.2 U1.3
GND: BT1.NEG BUS1.1 BUS1.10 BUS1.31 C1.2 C2.2 C3.2 C4.2 C5.2 C6.2 C7.2 C8.2 C9.2 C10.2 C11.2 C12.2 C13.2 C14.2 C15.2 C17.2 C18.2 C19.2 C20.2 C21.2 C22.2 C23.2 C24.2 C25.2 C26.2 C27.2 C28.1 C29.1 C31.2 C33.1 C34.1 C38.2 C39.2 C40.2 C41.2 C44.2 C45.2 C46.2 C47.2 C48.2 C49.2 C50.1 C51.1 C52.2 C53.1 CD1.2 CD2.2 CD3.2 CD4.2 CD5.2 CD6.2 CD7.2 CD8.2 CD9.2 CD10.2 CD11.2 CD12.2 CD13.2 CD14.2 CD15.2 CD16.2 CD17.2 CD18.2 CD19.2 CD20.2 CD21.2 CD22.2 CD23.2 CD24.2 CD25.2 CD27.2 CD28.2 CD29.2 CD32.2 CD42.2 CD43.2 D1.A J1.1 J5.2 P1.5 P1.6 P1.7 P1.8 P1.10 P2.9 P3.1 P3.5 P3.7 P3.11 P3.13 P3.15 P3.19 P3.21 P3.23 P3.25 P3.29 P3.31 P4.1 P5.1 P5.2 P5.R8 Q1.1 R3.2 R7.1 R8.1 R9.1 R11.2 R12.2 R13.2 R14.2 R15.2 R21.2 R25.2 R28.2 R30.1 R31.1 R37.1 RN4.8 RN5.1 RN5.2 RN5.3 RN5.4 RN5.5 RN5.6 RN5.7 RN5.8 RV1.1 SW2.3 SW2.4 SW2.5 SW2.6 SW2.7 U1.1 U1.7 U1.23 U1.41 U1.42 U1.49 U1.50 U1.58 U1.79 U1.80 U1.101 U1.121 U1.122 U1.126 U1.128 U1.143 U1.160 U2.16 U2.20 U3.16 U3.20 U4.16 U4.20 U5.16 U5.20 U6.14 U6.20 U7.8 U8.4 U8.5 U8.8 U9.21 U9.22 U9.25 U9.28 U10.7 U11.20 U12.9 U12.12 U12.16 U12.21 U12.30 U12.35 U12.36 U12.45 U12.50 U12.54 U12.59 U12.65 U13.1 U13.10 U13.17 U13.18 U14.14 U15.12 U16.8 U17.4 U17.8 U18.10 U19.7 U20.7 U21.6 U23.4 U24.14 U24.28 U24.44 U24.52 U24.83 U24.86 U25.5 U26.16 U27.12 U27.13 U27.16 U28.10 U29.8 U30.1 U30.3 U30.5 U30.7 U30.9 | length 3337
  Top Copper w5: v1(10850,768) 10850.4,768.4 10850.4,851.2 U1.143@10850.8,851.6
  Top Copper w12: v1(10256.3,2080.9) 10286.9,2080.9 U1.80@10287.8,2080 U1.79@10313.4,2080 ; 11285.8,709.55 U1.160@11285.8,851.6 ; v1(11399,2139) 11452.43,2139 CD5.2@11453,2138.43 ; v1(11400.57,936.26) 11401,936.69 U1.1@11401,966.8
  Top Copper w15: C28.1@433.8,3080.1 C28.1@433.8,3084.04 ; SW2.3@5343.79,1721.34 5344.42,1721.97 v1(5344.42,1770.14) 5344.42,1820.71 SW2.4@5343.79,1821.34 SW2.5@5343.79,1921.34 SW2.6@5343.79,2021.34 SW2.7@5343.79,2121.34 ; v1(10911,477) 10969.84,477 C17.2@10970,477.16 ; v2(11222.07,405.8) 11222.5,405.8 11285.8,469.1 11285.8,709.55 ; v1(11931.27,1192.33) 11931.67,1192.73 R9.1@11931.67,1235.34 R8.1@11931.67,1325.44 R7.1@11931.67,1415.55 C46.2@12083.99,1415.55 C47.2@12083.99,1249.55 ; v1(12372,1942) 12372,1992.52 C27.2@12371.47,1993.04 C26.2@12371.47,2134.03 12368.72,2136.79 C25.2@12368.72,2275.61 12371.47,2278.37 C24.2@12371.47,2416.01 C23.2@12371.47,2557 C22.2@12371.47,2697.99 v1(12421,2698)
  Bottom Copper w20: BUS1.31@9105,135 9110,140 v2(9110,403.9) ; BUS1.10@11205,135 11220,150 11220,403.73 v2(11222.07,405.8) ; BUS1.1@12105,135 12114.9,144.9 v2(12114.9,407)
HDSEL: P3.32 U12.51
HSYNC: FB5.2 U1.48
INDEX: P3.8 RR1.2 U12.26
IOCHRDY: BUS1.41 U1.157 U24.35 | length 3223.9
  Top Copper w12: U24.35@9444.7,1426.91 9504.9,1426.91 9598.76,1426.91 v1(9599.3,1426.38) ; v2(11182.22,355) 11182.22,745.22 11209,772 U1.157@11209,851.6
  Top Copper w20: v2(11182.22,355) 11182.22,157.78 BUS1.41@11205,135
  Bottom Copper w12: v1(9599.3,1426.38) 9600.92,1426.38 9606.51,1420.79 9607.58,1420.79 9623.3,1405.07 9623.3,1259.88 9564,1200.58 9564,1047.39 9662.34,949.05 10511.07,949.05 10750.57,709.55 10977.12,483 11074.53,483 11155.71,401.82 11155.71,381.51 v2(11182.22,355)
IRQ3: BUS1.25 J4.01 SW1.1 SW8.1B U24.3 | length 273.8
  Bottom Copper w20: BUS1.25@9705,135 9716.8,146.8 v2(9716.8,403.9)
IRQ4: BUS1.24 SW1.2 SW8.2B U24.2 | length 273.8
  Bottom Copper w20: BUS1.24@9805,135 9816.83,146.83 v2(9816.83,403.9)
IRQ5: BUS1.23 J4.03 SW1.3 SW8.3B U24.1 | length 257.5
  Bottom Copper w20: BUS1.23@9903.4,146.2 v2(9903.4,403.73)
IRQ6: BUS1.22 SW8.4B U12.23 | length 280.7
  Bottom Copper w20: BUS1.22@10005,135 10016.6,146.6 v2(10016.6,410.9)
IRQ7: BUS1.21 SW1.4 SW8.5B | length 283.8
  Bottom Copper w20: BUS1.21@10105,135 10116.6,146.6 v2(10116.6,414)
IRQ9: BUS1.4 J4.05 SW8.6B U24.4 | length 278
  Bottom Copper w20: BUS1.4@11805,135 11820,150 11820,403.53 v2(11822.27,405.8)
JP: RN1.1 U24.65
LED_CRS: R36.2 U24.62
LED_LINK: R35.2 U24.61
MAA0: U1.52 U2.6 U3.6 | length 489.5
  Signal Layer 2 w12: U2.6@8993.96,3333.48 9044.5,3384.03 9044.5,3653.7 8993.96,3704.24 U3.6@8993.96,3781.14
MAA1: U1.53 U2.7 U3.7 | length 487
  Signal Layer 2 w12: U2.7@9093.96,3333.48 9141.5,3381.03 9141.5,3653.9 9093.96,3701.44 U3.7@9093.96,3781.14
MAA2: U1.54 U2.8 U3.8 | length 488.9
  Signal Layer 2 w12: U2.8@9193.96,3333.48 9243.8,3383.33 9243.8,3654.7 9193.96,3704.54 U3.8@9193.96,3781.14
MAA3: U1.55 U2.9 U3.9 | length 488.5
  Signal Layer 2 w12: U2.9@9293.96,3333.48 9343.3,3382.83 9343.3,3661.6 9293.96,3710.94 U3.9@9293.96,3781.14
MAA4: U1.56 U2.11 U3.11 | length 3032
  Top Copper w12: U1.56@10902,2080 v1(10902,2227.5)
  Signal Layer 2 w12: 9379.62,4055.12 9343.3,4018.8 9343.3,3706.7 9385.73,3664.27 9385.73,3641.71 U2.11@9393.96,3633.48 ; 9379.62,4055.16 9393.96,4069.5 U3.11@9393.96,4081.14
  Bottom Copper w12: U2.11@9393.96,3633.48 9393.96,3541.64 9695.3,3240.3 9695.3,2815.08 10163.08,2347.3 10784.88,2347.3 10902,2230.18 v1(10902,2227.5)
MAA5: U1.57 U2.12 U3.12 | length 3057.1
  Top Copper w12: U1.57@10876.4,2080 v1(10876.4,2227.5)
  Signal Layer 2 w12: U2.12@9293.96,3633.48 9245.7,3681.74 9245.7,4032.88 U3.12@9293.96,4081.14
  Bottom Copper w12: U2.12@9293.96,3633.48 9378.46,3548.98 9378.46,3531.54 9679.8,3230.2 9679.8,2808.66 10156.66,2331.8 10749.18,2331.8 10853.48,2227.5 v1(10876.4,2227.5)
MAA6: U1.59 U2.13 U3.13 | length 3081.3
  Top Copper w12: U1.59@10825.2,2080 10825.2,2145.05 v1(10825.2,2227.5)
  Signal Layer 2 w12: U2.13@9193.96,3633.48 9144.3,3683.14 9144.3,4031.48 U3.13@9193.96,4081.14
  Bottom Copper w12: U2.13@9193.96,3633.48 9361.02,3466.43 9392.37,3466.43 9664.3,3194.5 9664.3,2802.24 10150.24,2316.3 10739.08,2316.3 10825.2,2230.18 v1(10825.2,2227.5)
MAA7: U1.60 U2.14 U3.14 | length 3154.3
  Top Copper w12: U1.60@10799.6,2080 10799.6,2145.05 v1(10799.6,2227.5)
  Signal Layer 2 w12: U2.14@9093.96,3633.48 9086.31,3641.14 9086.31,3661.09 9043.4,3704 9043.4,4030.58 U3.14@9093.96,4081.14
  Bottom Copper w12: U2.14@9093.96,3633.48 9097.97,3629.47 9139.46,3629.47 9318,3450.93 9382.27,3450.93 9648.8,3184.4 9648.8,2795.82 10143.82,2300.8 10728.98,2300.8 10794,2235.78 10794,2234.72 10799.6,2229.12 v1(10799.6,2227.5)
MAA8: U1.61 U2.15 U3.15 | length 3224.8
  Top Copper w12: U1.61@10774,2080 10774,2145.05 v1(10774,2227.5)
  Signal Layer 2 w12: U2.15@8993.96,3633.48 8943.5,3683.94 8943.5,4030.68 U3.15@8993.96,4081.14
  Bottom Copper w12: U2.15@8993.96,3633.48 9192.02,3435.43 9372.17,3435.43 9633.3,3174.3 9633.3,2789.4 10137.4,2285.3 10716.2,2285.3 v1(10774,2227.5)
MAB0: U1.73 U4.6 U5.6 | length 2366
  Top Copper w12: v1(10466.3,2200.3) 10466.6,2200 10466.6,2080.3 U1.73@10466.9,2080
  Signal Layer 2 w12: U5.6@8993.96,2438.18 8943.9,2488.24 8943.9,2798.2 8992.39,2846.69 8992.39,2884.27 U4.6@8993.96,2885.83
  Bottom Copper w12: U4.6@8993.96,2885.83 8997.97,2881.82 9039.46,2881.82 9141.72,2779.56 9554.74,2779.56 10132.63,2201.67 10460.69,2201.67 10460.91,2201.45 10465.15,2201.45 v1(10466.3,2200.3)
MAB1: U1.74 U4.7 U5.7 | length 2256.8
  Top Copper w12: v1(10441.1,2221.67) 10441.2,2221.57 10441.2,2080.1 U1.74@10441.3,2080
  Signal Layer 2 w12: U5.7@9093.96,2438.18 9042.4,2489.74 9042.4,2793.1 9093.96,2844.66 U4.7@9093.96,2885.83
  Bottom Copper w12: U4.7@9093.96,2885.83 9097.97,2881.82 9139.46,2881.82 9226.22,2795.06 9561.88,2795.06 10138.27,2218.67 10413.98,2218.67
  Bottom Copper w15: 10413.98,2218.67 10416.41,2221.09 10440.53,2221.09 v1(10441.1,2221.67)
MAB2: U1.75 U4.8 U5.8 | length 2147.7
  Top Copper w12: U1.75@10415.7,2080 10415.7,2242.8 v1(10415.8,2242.9)
  Signal Layer 2 w12: U5.8@9193.96,2438.18 9142.1,2490.04 9142.1,2790.3 9193.96,2842.16 U4.8@9193.96,2885.83
  Bottom Copper w12: U4.8@9193.96,2885.83 9197.97,2881.82 9239.46,2881.82 9310.72,2810.56 9568.3,2810.56 10143.19,2235.67 10406.94,2235.67 10414.18,2242.9 v1(10415.8,2242.9)
MAB3: U1.76 U4.9 U5.9 | length 2021.4
  Top Copper w12: U1.76@10390.1,2080 10390.1,2255.57 v1(10390.2,2255.67)
  Signal Layer 2 w12: U5.9@9293.96,2438.18 9244.7,2487.44 9244.7,2783.5 9293.96,2832.76 U4.9@9293.96,2885.83
  Bottom Copper w12: U4.9@9293.96,2885.83 9297.97,2881.82 9339.46,2881.82 9395.22,2826.06 9574.72,2826.06 10145.11,2255.67 v1(10390.2,2255.67)
MAB4: U1.77 U4.11 U5.11 | length 1903.6
  Top Copper w12: U5.11@9393.96,2738.18 9443.3,2738.18 9646.1,2535.38 9646.1,2433.83 10083.98,1995.95 10345.05,1995.95 10363.7,2014.6 10363.7,2079.1 U1.77@10363.78,2079.18
  Signal Layer 2 w12: U5.11@9393.96,2738.18 9393.96,2787.5 9450.6,2844.14 9450.6,3129.19 U4.11@9393.96,3185.83
MAB5: U1.78 U4.12 U5.12 | length 1987.7
  Top Copper w12: U5.12@9293.96,2738.18 9297.97,2742.19 9339.46,2742.19 9376.82,2779.56 9423.84,2779.56 9661.6,2541.8 9661.6,2447.5 10097.65,2011.45 10331.07,2011.45 10338.1,2018.48 10338.1,2079.1 U1.78@10339,2080
  Signal Layer 2 w12: U5.12@9293.96,2738.18 9293.96,2791.59 9342.9,2840.53 9342.9,3136.89 U4.12@9293.96,3185.83
MAB6: U1.82 U4.13 U5.13 | length 1858.9
  Top Copper w12: U5.13@9193.96,2738.18 9265.78,2666.36 9493.2,2666.36 9630.6,2528.96 9630.6,2427.41 10029.7,2028.32 10117.91,1940.1 10171.7,1940.1 U1.82@10172.6,1939.2
  Signal Layer 2 w12: U5.13@9193.96,2738.18 9193.96,2793.62 9244.9,2844.57 9244.9,3134.89 U4.13@9193.96,3185.83
MAB7: U1.83 U4.14 U5.14 | length 1971.1
  Top Copper w12: U5.14@9093.96,2738.18 9181.28,2650.86 9486.78,2650.86 9605,2532.64 9605,2427.5 10029.7,2002.8 10104.05,1928.45 10104.05,1928.37 10109.61,1922.8 10109.7,1922.8 10118,1914.5 10171.7,1914.5 U1.83@10172.6,1913.6
  Signal Layer 2 w12: U5.14@9093.96,2738.18 9093.96,2798.29 9144.2,2848.53 9144.2,3135.59 U4.14@9093.96,3185.83
MAB8: U1.84 U4.15 U5.15 | length 2083.2
  Top Copper w12: U5.15@8993.96,2738.18 9101.93,2630.21 9485.51,2630.21 9579.4,2536.32 9579.4,2427.41 10029.7,1977.12 10117.91,1888.9 10171.7,1888.9 U1.84@10172.6,1888
  Signal Layer 2 w12: U5.15@8993.96,2738.18 8993.96,2802.76 9043.39,2852.19 9043.39,3136.4 U4.15@8993.96,3185.83
MCLK: U15.24 U20.9
MD0: U1.64 U2.1
MD1: U1.65 U2.2
MD2: R16.1 U1.66 U2.18
MD3: R12.1 U1.67 U2.19
MD4: U1.68 U3.1
MD5: U1.70 U3.2
MD6: U1.71 U3.18
MD7: R11.1 U1.72 U3.19
MD16: U1.89 U4.1
MD17: U1.90 U4.2
MD18: U1.91 U4.18
MD19: U1.92 U4.19
MD20: U1.93 U5.1
MD21: U1.94 U5.2
MD22: U1.95 U5.18
MD23: U1.96 U5.19
MEA: P3.10 U12.57
MEB: P3.16 U12.61
MONITOR: FB4.2 R10.1 U1.46
nBCS: U24.75 U26.22
nCAS: C20.1 R5.2 U2.17 U3.17 U4.17 U5.17 | length 979.8
  Signal Layer 2 w12: U5.17@8793.96,2738.18 8793.96,2803.04 8845.2,2854.28 8845.2,3134.59 U4.17@8793.96,3185.83 ; U2.17@8793.96,3633.48 8743.2,3684.24 8743.2,4030.38 U3.17@8793.96,4081.14
nCTS: U9.40 U11.14
nDACK2: BUS1.26 U12.3 | length 272.8
  Bottom Copper w20: BUS1.26@9605,135 9618.42,148.42 v2(9618.42,402.25)
nDCD: U9.42 U11.19
nDEC1: U28.19 U29.1 U29.15
nDSR: U9.41 U11.18
nDTR: U9.37 U11.13
NetC15_1: C15.1 L3.1
NetC16_1: C16.1 U1.125
NetC17_1: C17.1 R1.1 U1.154 | length 462.7
  Top Copper w12: R1.1@11052.37,567.01 11032.21,546.84 C17.1@10970,546.84 10970,598.76 11080.79,709.55 11132.3,761.06 U1.154@11132.3,851.6
NetC19_1: C19.1 R2.2 U1.5
NetC22_1: C22.1 FB1.2 P1.1 | length 121.5
  Top Copper w20: FB1.2@12183.22,2691.96 12186.24,2694.97 12299.16,2694.97 C22.1@12302.18,2697.99
NetC23_1: C23.1 FB2.2 P1.2 | length 121.4
  Top Copper w20: FB2.2@12183.22,2551.11 12186.17,2554.06 12299.23,2554.06 C23.1@12302.18,2557
NetC24_1: C24.1 FB3.2 P1.3 | length 121.3
  Top Copper w20: FB3.2@12183.22,2410.27 12186.1,2413.14 12299.31,2413.14 C24.1@12302.18,2416.01
NetC25_1: C25.1 FB4.1 P1.12 | length 113.3
  Top Copper w20: FB4.1@12183.22,2269.42 12186.32,2272.52 12290.82,2272.52 C25.1@12293.91,2275.61
NetC26_1: C26.1 FB5.1 P1.13 | length 121.2
  Top Copper w20: FB5.1@12183.22,2128.58 12185.95,2131.3 12299.45,2131.3 C26.1@12302.18,2134.03
NetC27_1: C27.1 FB6.1 P1.14 | length 121.2
  Top Copper w20: FB6.1@12183.22,1987.73 12185.88,1990.39 12299.52,1990.39 C27.1@12302.18,1993.04
NetC28_2: C28.2 U12.33 X2.2
NetC29_2: C29.2 U12.34 X2.1
NetC30_1: C30.1 U12.37
NetC30_2: C30.2 U12.38
NetC31_1: C31.1 U21.7 U22.2
NetC32_1: C32.1 R18.2 R19.1
NetC32_2: C32.2 R20.2 R22.1 U22.10
NetC33_2: C33.2 R19.2 U22.9
NetC34_2: C34.2 R23.2 U22.13
NetC35_1: C35.1 R22.2 R23.1
NetC36_2: C36.2 R27.1 R28.1
NetC37_2: C37.2 D1.C R26.1
NetC38_1: C38.1 Q1.3 R27.2 R29.1
NetC39_1: C39.1 R29.2 RV1.3
NetC40_1: C40.1 U23.2
NetC41_1: C41.1 U23.7
NetC42_2: C42.2 R30.2
NetC43_N: C43.N R31.2 R32.1 R33.1 | length 218.8
  Top Copper w20: C43.N@12253.9,3312.87 R33.1@12472.72,3312.87
NetC44_1: C44.1 R34.2 U24.50 X3.1
NetC45_1: C45.1 R34.1 U24.51 X3.2
NetC46_1: C46.1 P5.R5
NetC47_1: C47.1 P5.R4
NetJ1_2: J1.2 R16.2
NetJ2_2: J2.2 P3.3
NetJ3_1: J3.1 U16.14
NetJ3_3: J3.3 U16.13
NetJ3_5: J3.5 U16.10
NetJ5_1: J5.1 U27.21
NetL3_2: L3.2 U1.131 X1.2
NetP3_6: P3.6 U12.28
NetP4_2: P4.2 R33.2
NetP4_5: P4.5 R32.2
NetP5_L2: P5.L2 R36.1
NetP5_L3: P5.L3 R35.1
NetQ1_2: Q1.2 R26.2
NetR3_1: R3.1 U1.18
NetR4_1: R4.1 U1.86
NetR5_1: R5.1 U1.85
NetR6_2: R6.2 U1.102
NetR18_1: R18.1 U22.4 U22.6
NetR20_1: R20.1 R21.1 U22.8
NetR24_1: R24.1 R25.1 U22.14
NetRN1_5: RN1.5 SW4.2
NetRN1_6: RN1.6 SW4.1
NetRN1_7: RN1.7 SW3.2
NetRN1_8: RN1.8 SW3.1
NetRN2_5: RN2.5 SW5.4
NetRN2_6: RN2.6 SW5.3
NetRN2_7: RN2.7 SW5.2
NetRN2_8: RN2.8 SW5.1
NetRN3_5: RN3.5 SW6.4
NetRN3_6: RN3.6 SW6.3
NetRN3_7: RN3.7 SW6.2
NetRN3_8: RN3.8 SW6.1
NetRN4_7: RN4.7 SW6.5
NetRN5_9: RN5.9 SW7.16 U28.3
NetRN5_10: RN5.10 SW7.15 U28.5
NetRN5_11: RN5.11 SW7.14 U28.7
NetRN5_12: RN5.12 SW7.13 U28.9
NetRN5_13: RN5.13 SW7.12 U28.12
NetRN5_14: RN5.14 SW7.11 U28.14
NetRN5_15: RN5.15 SW7.10 U28.16
NetRN5_16: RN5.16 SW7.9 U28.18
NetRR2_4: RR2.4 SW2.3.1 U13.7
NetRR2_5: RR2.5 SW2.4.1 U13.9
NetRR2_6: RR2.6 SW2.5.1 U13.12
NetRR2_7: RR2.7 SW2.6.1 U13.14
NetRR2_8: RR2.8 SW2.7.1 U13.16
NetRV1_2: RV1.2 U23.3
NetSW1_5: SW1.5 U7.11
NetSW1_6: SW1.6 U7.10
NetSW1_7: SW1.7 U7.9
NetSW1_8: SW1.8 U7.7
NetU1_133: U1.133 X1.1
NetU7_5: U7.5 U8.7
NetU9_10: U9.10 U9.17
NetU9_18: U9.18 U10.8
NetU16_5: U16.5 U17.15
NetU19_4: U19.4 U19.11
NetU19_6: U19.6 U19.9
NetU20_2: U20.2 U20.6
NetU20_5: U20.5 U20.11
NetU20_8: U20.8 U20.12
NetU21_2: U21.2 U22.5
NetU21_8: U21.8 U22.1 U22.3
NetU27_2: U27.2 X4.1
NetU27_3: U27.3 X4.2
NetU29_12: U29.12 U30.11
nEXPROMCS: RR2.2 SW2.1.1 U14.20
nEXPROMCS_in: SW2.1 U13.19
nFDC_CS: U7.12 U12.6
nIOCHCK: BUS1.32 U1.24 | length 229.3
  Top Copper w20: v2(12082.52,355) 12082.52,157.48 BUS1.32@12105,135
nIOCS16: R37.2 U24.96
nIOR: BUS1.14 U1.153 U9.24 U12.4 U19.3 U24.29 U29.2 | length 841.6
  Top Copper w12: v2(10821.93,405.8) 10821.93,472.96 11058.53,709.55 11106.7,757.72 U1.153@11106.7,851.6
  Bottom Copper w20: BUS1.14@10805,135 10820,150 10820,403.87 v2(10821.93,405.8)
nIOW: BUS1.13 R1.2 U9.20 U12.5 U19.5 U24.30 U29.14 | length 436.7
  Top Copper w12: v2(10921.97,405.8) 10983.69,405.8 R1.2@11052.37,474.49
  Bottom Copper w20: BUS1.13@10905,135 10920,150 10920,403.83 v2(10921.97,405.8)
nMEMR: BUS1.12 C18.1 U1.155 U14.22 | length 819.1
  Top Copper w12: v2(11022,405.8) 11088.8,405.8 11108,425 11108,709.55 11108,714.84 11157.9,764.74 U1.155@11157.9,851.6
  Bottom Copper w20: BUS1.12@11005,135 11020,150 11020,403.8 v2(11022,405.8)
nMEMW: BUS1.11 SW2.2 U1.156 | length 749.1
  Top Copper w12: v2(11122.03,405.8) 11123.5,407.27 11123.5,708.42 11124.63,709.55 11183.4,768.32 U1.156@11183.4,851.6
  Bottom Copper w20: BUS1.11@11105,135 11120,150 11120,403.77 v2(11122.03,405.8)
nOPL_CS: J3.2 J3.4 J3.6 J3.7 J3.8 U15.7 U16.9 U18.19
nOPL_IRQ: R17.2 U15.2 U19.1
nOPL_RD: U15.6 U18.1 U19.10
nOPL_WR: U15.5 U19.8
nRAS: C21.1 R4.2 U2.4 U3.4 U4.4 U5.4 | length 979.1
  Signal Layer 2 w12: U5.4@8793.96,2438.18 8742,2490.14 8742,2801 8790.04,2849.04 8790.04,2881.92 U4.4@8793.96,2885.83 ; U2.4@8793.96,3333.48 8843.2,3382.73 8843.2,3656.8 8793.96,3706.04 U3.4@8793.96,3781.14
nREFRESH: BUS1.19 U1.158 | length 714
  Top Copper w12: v1(11203,425) 11202.5,425.5 11202.5,741.5 11234.6,773.6 U1.158@11234.6,851.6
  Bottom Copper w20: BUS1.19@10305,135 10317,147 v2(10317,403.9)
nRESET: U15.3 U19.12
nRI: U9.43 U11.12
nROMCS: U1.45 U6.22
nROMW: RR2.3 SW2.2.1 U14.27
nRTC_RD: U27.17 U29.6
nRTC_WR: U27.15 U29.10
nRTCIRQ: U27.19 U30.13
nRTS: U9.36 U11.16
nSIN: U9.11 U11.17
nSMEMR: U24.31 U26.24
nSMEMW: U24.32 U26.31
nSOUT: U9.13 U11.15
nUART_CS: SW1.5.1 SW1.6.1 SW1.7.1 SW1.8.1 U9.16
nWE0: U1.88 U2.3 U3.3
nWE2: U1.87 U4.3 U5.3 | length 488.1
  Signal Layer 2 w12: U5.3@8693.96,2438.18 8645.1,2487.04 8645.1,2803.8 8690.19,2848.89 8690.19,2882.07 U4.3@8693.96,2885.83
OPL_IRQ: J4.02 J4.04 J4.06 U19.2
OSC: BUS1.30 U1.98 U20.3 | length 273.7
  Bottom Copper w20: BUS1.30@9205,135 9216.63,146.63 v2(9216.63,403.9)
R: FB1.1 R7.2 U1.4
RDATA: P3.30 RR1.5 U12.41
RESET: BUS1.2 R2.1 U19.13 U24.33 | length 278
  Bottom Copper w20: BUS1.2@12005,135 12020,150 12020,403.47 v2(12022.33,405.8)
RESETDRV: U9.39 U12.32
RI: P2.8 U11.9
RMD0: U1.43 U6.11
RMD1: R13.1 U1.39 U6.12
RMD2: U1.38 U6.13
RMD3: U1.37 U6.15
RMD4: R14.1 U1.36 U6.16
RMD5: U1.35 U6.17
RMD6: R15.1 U1.34 U6.18
RMD7: U1.33 U6.19
ROMA0: U1.97 U6.27
RTC_ALE: U27.14 U30.10
RTC_IRQ: SW8.1A SW8.2A SW8.3A SW8.4A SW8.5A SW8.6A U30.12
RTS: P2.4 U11.5
RX: P2.3 U11.4
STEP: P3.20 U12.55
TC: BUS1.27 U12.25 | length 273.8
  Bottom Copper w20: BUS1.27@9505,135 9516.73,146.73 v2(9516.73,403.9)
TP_RX_N: P5.R6 R38.2 U24.58 | length 4011.4
  Top Copper w12: v1(9162.89,1853.37) 9162.89,1920.7 U24.58@9164.19,1921.99 ; R38.2@12302.47,1514.19 12302.47,1427.31 12357.07,1372.7 12357.07,1265.8 P5.R6@12315.48,1224.21
  Signal Layer 2 w12: v1(9162.89,1853.37) 9903.83,1853.37 10733.8,1023.4 12170.8,1023.4 12224,1076.6 12224,1132.73 P5.R6@12315.48,1224.21
TP_RX_P: P5.R3 R38.1 U24.59 | length 4216.3
  Top Copper w12: U24.59@9138.6,1921.99 9139.89,1920.7 v1(9139.89,1853.37) ; R38.1@12376.48,1514.19 12376.48,1507.49 12457.07,1426.9 12457.07,1115.41 P5.R3@12415.48,1073.82
  Signal Layer 2 w12: v1(9139.89,1853.37) 9141.04,1852.22 9141.04,1846.94 9260.87,1727.11 10008.17,1727.11 10029.56,1705.72 10716.64,1018.64 10727.38,1007.9 12240.74,1007.9 12306.66,1073.82 P5.R3@12415.48,1073.82
TP_TX_N: P5.R2 U24.46 | length 3187.9
  Top Copper w15: U24.46@9444.7,1708.41 9546.59,1708.41 9547.89,1707.11 v1(9548.7,1707.11)